# Altium PCB XC95144XL DEVBOARD.PcbDoc
Units mm, origin at the board's own origin, x right, y up, seen from the top; angles counter-clockwise.
Board outline 78.74 x 81.28 mm, 2 copper layers (Top Layer, Bottom Layer), stack 1.569 mm thick; 24 components, 91 nets, 253 pads, 68 vias.
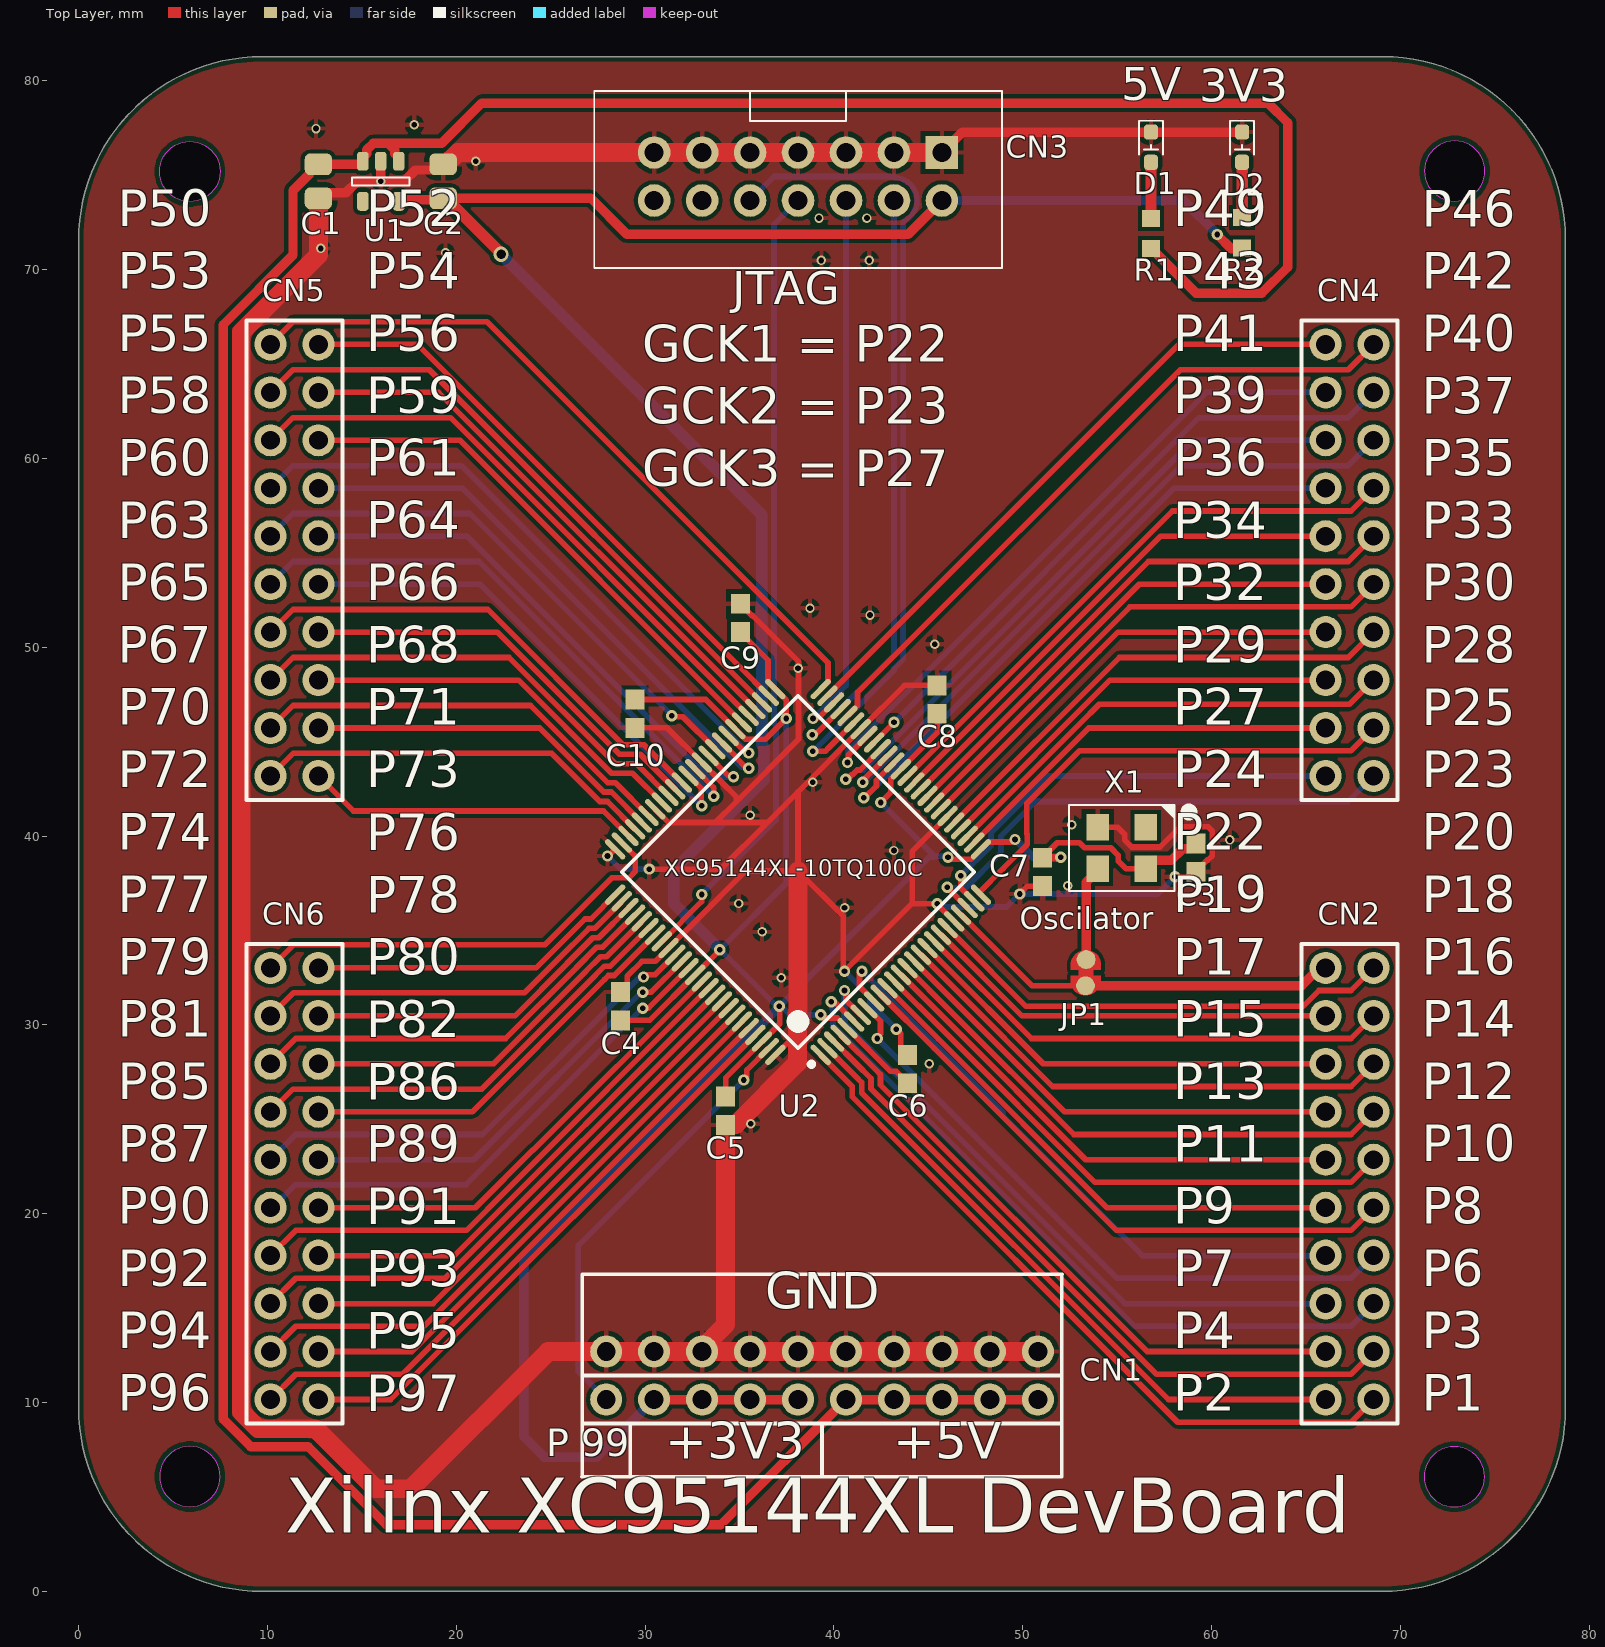
[diagram p0: Top Layer view]
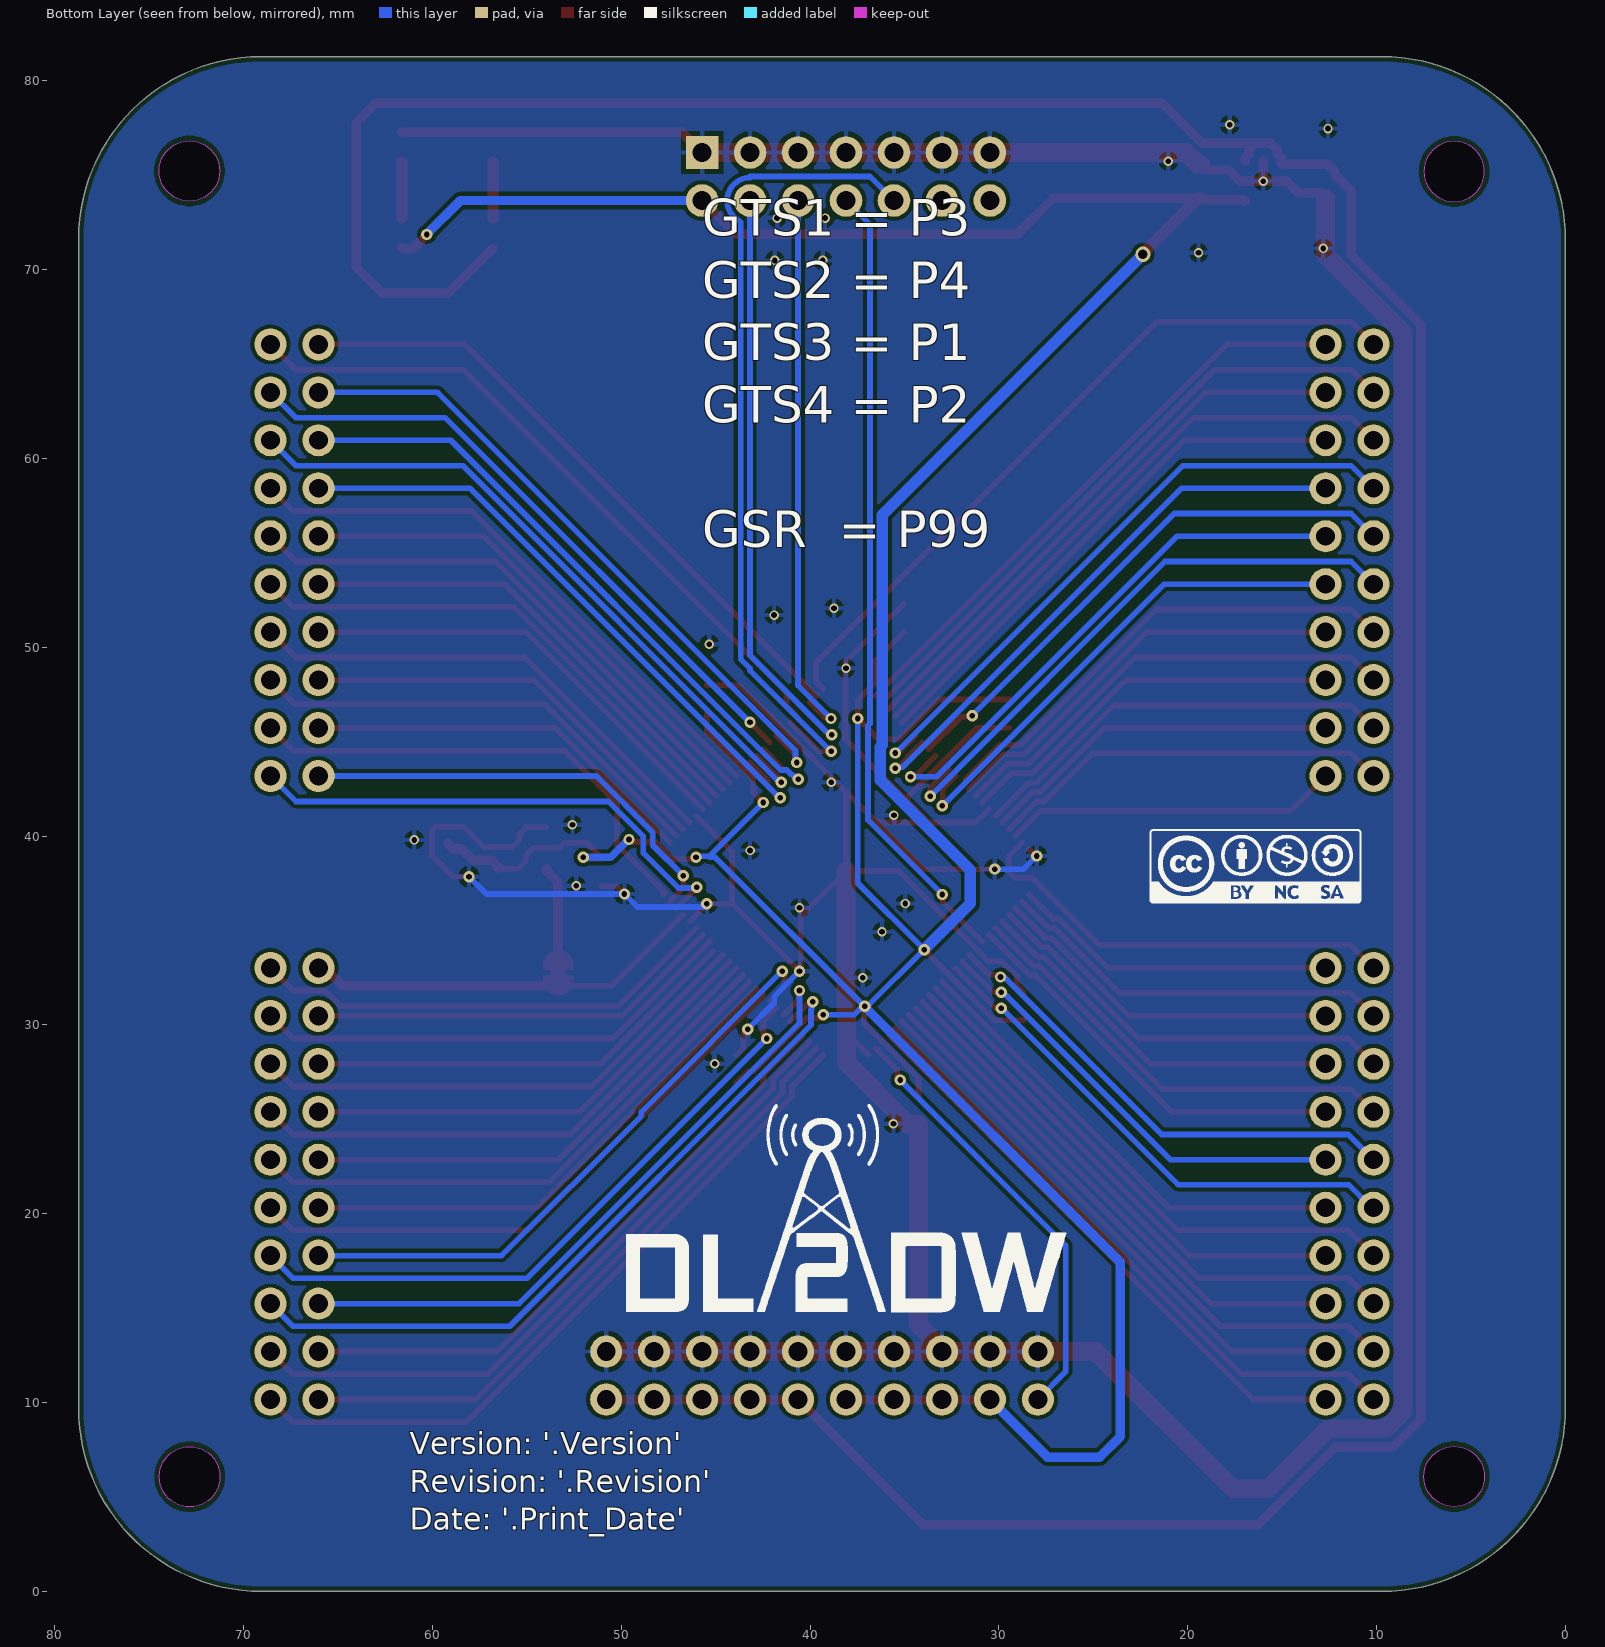
[diagram p1: Bottom Layer view, seen from below]
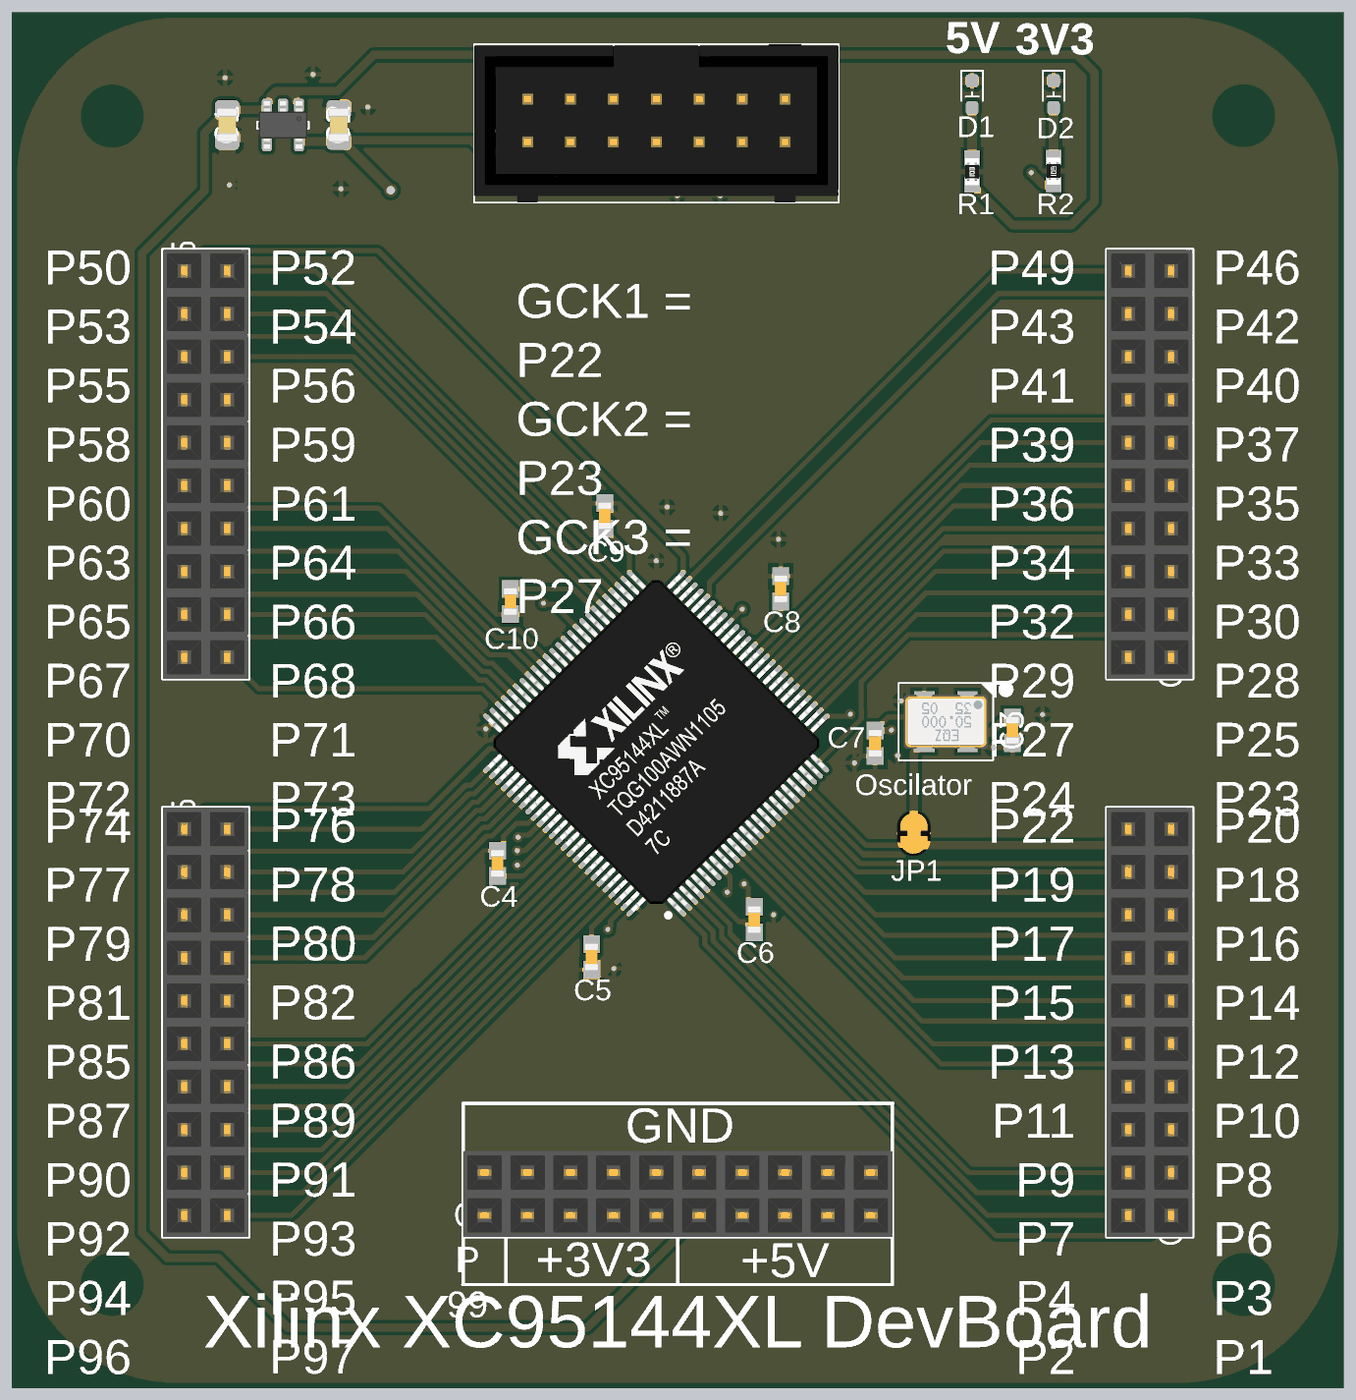
[diagram p2: 3D render of the assembled board from above, using the file's embedded part models]

## Layer stack, top to bottom
Top Solder: solder mask 0.0254, SM-001, Dk 4
Top Layer: signal copper 0.035
Dielectric 1: core 1.4986, Core-043, Dk 4.3
Bottom Layer: signal copper 0.035
Bottom Solder: solder mask 0.0254, SM-001, Dk 4

## Board outline
0,9.713 0,71.567 cw(c9.713,71.567) 9.713,81.28 69.079,81.28 cw(c69.079,71.619) 78.74,71.619 78.74,9.689 cw(c69.051,9.689) 69.051,0 9.713,0 cw(c9.713,9.713)
cut-out: 71.259,6.071 ccw(c72.859,6.071) 72.859,4.471 ccw(c72.859,6.071) 74.459,6.071 ccw(c72.859,6.071) 72.859,7.671 ccw(c72.859,6.071)
cut-out: 4.293,6.083 ccw(c5.893,6.083) 5.893,4.483 ccw(c5.893,6.083) 7.493,6.083 ccw(c5.893,6.083) 5.893,7.683 ccw(c5.893,6.083)
cut-out: 5.893,73.597 cw(c5.893,75.197) 4.293,75.197 cw(c5.893,75.197) 5.893,76.797 cw(c5.893,75.197) 7.493,75.197 cw(c5.893,75.197)
cut-out: 71.273,75.223 ccw(c72.873,75.223) 72.873,73.623 ccw(c72.873,75.223) 74.473,75.223 ccw(c72.873,75.223) 72.873,76.823 ccw(c72.873,75.223)

## Design rules (kind name [scope] priority, off if disabled: settings)
BoardOutlineClearance [All] p1: gap=0.254 ignorepadtopadclearanceinfootprint=FALSE
Clearance [All] p1: gap=0.2 ignorepadtopadclearanceinfootprint=TRUE
ComponentClearance ComponentClearance_Sheet [HasFootprint('PCB Title Block DIN A4')] p1: gap=0 collisioncheckmode=3 verticalgap=0 showdistances=FALSE
ComponentClearance [All] p2: gap=0.254 collisioncheckmode=3 verticalgap=0.254 showdistances=FALSE
MinimumSolderMaskSliver [All] p1: minsoldermaskwidth=0.103
PolygonConnect [All] p1: connectstyle=Relief reliefconductorwidth=0.254 reliefentries=4 polygonreliefangle="90 Angle" airgapwidth=0.254
RoutingVias RoutingVias_Power [(InNet('VCC') OR InNet('GND') OR InNet('+5V'))] p1: holewidth=0.3 width=0.6 viastyle="Through Hole" minholewidth=0.3 minwidth=0.6 maxholewidth=0.6 maxwidth=1.2
RoutingVias [All] p2: holewidth=0.4 width=0.7 viastyle="Through Hole" minholewidth=0.3 minwidth=0.6 maxholewidth=0.5 maxwidth=0.8
SilkToSilkClearance [All] p1: silktosilkclearance=0
SilkToSolderMaskClearance [IsPad] p1: minsilkscreentomaskgap=0.2 clearancetoexposedcopper=TRUE
SolderMaskExpansion [All] p1: expansion=0.038 istentingtop=FALSE
UnRoutedNet [All] p1: checkbadconnections=TRUE
Width Width_Power [(InNet('VCC') OR InNet('GND') OR InNet('+5V'))] p1: maxlimit=1 minlimit=0.3 preferedwidth=0.3
Width [All] p2: maxlimit=0.6 minlimit=0.3 preferedwidth=0.4
25 further rules are at their usual default settings.

## Components (designator, comment, footprint, x,y, rotation, side; value= is the part's Value field where it differs from the comment)
C1 "10µF" "Kemet C0805CxxxK8RACTU Series H=1.4mm" 12.7,74.676 r90 top
C2 "10µF" "Kemet C0805CxxxK8RACTU Series H=1.4mm" 19.304,74.676 r270 top
C3 "100nF" "CAP 100nF SMD 0603 C0603C104J3RACTU" 59.182,38.862 r90 top
C4 "100nF" "CAP 100nF SMD 0603 C0603C104J3RACTU" 28.702,30.988 r270 top
C5 "100nF" "CAP 100nF SMD 0603 C0603C104J3RACTU" 34.265,25.451 r90 top
C6 "100nF" "CAP 100nF SMD 0603 C0603C104J3RACTU" 43.898,27.663 r270 top
C7 "100nF" "CAP 100nF SMD 0603 C0603C104J3RACTU" 51.054,38.1 r90 top
C8 "100nF" "CAP 100nF SMD 0603 C0603C104J3RACTU" 45.466,47.232 r270 top
C9 "100nF" "CAP 100nF SMD 0603 C0603C104J3RACTU" 35.052,51.55 r270 top
C10 "100nF" "CAP 100nF SMD 0603 C0603C104J3RACTU" 29.464,46.482 r90 top
CN1 "Power" "Female Pin Header 02x10 Straight P2.54mm H8.5mm" 27.94,10.16 r0 top locked
CN2 "ext. CN 1" "Female Pin Header 02x10 Straight P2.54mm H8.5mm" 68.58,10.16 r90 top locked
CN3 "JTAG" "IDC Header 2x7 P2.54mm Straight" 45.72,76.2 r90 top
CN4 "ext. CN 2" "Female Pin Header 02x10 Straight P2.54mm H8.5mm" 68.58,43.18 r90 top locked
CN5 "ext. CN 3" "Female Pin Header 02x10 Straight P2.54mm H8.5mm" 10.16,66.04 r270 top locked
CN6 "ext. CN 4" "Female Pin Header 02x10 Straight P2.54mm H8.5mm" 10.16,33.02 r270 top locked
D1 "5V" "LED Red SMD 0603" 56.794,76.485 r270 top
D2 "3V3" "LED Green SMD 0603" 61.62,76.485 r270 top
JP1 "Oscilator" "Solder Jumper Closed" 53.34,32.766 r90 top net-tie
R1 "1k" "1k Ohm R 0603 SMD" 56.794,71.913 r90 top
R2 "1k" "1k Ohm R 0603 SMD" 61.62,71.951 r90 top
U1 "SPX5205M5-L-3-3/TR" SOT-23-5 16.002,74.676 r180 top
U2 "XC95144XL-10TQ100C" "TQFP-100 P0.5mm XC95144XL-7TQ100C" 38.1,38.1 r135 top locked
X1 "50MHz" "50.000MHZ Oscilator EuroQuartz XO53050UITA" 55.245,39.37 r180 top

## Footprints (in the part's own frame and the unit in brackets; to place one, negate y for a bottom-side part, rotate by r counter-clockwise, add the part's x,y. Pads: shape width x height; smd on the part's side, far side on the other; paste and mask are expansions set on the pad)
"1k Ohm R 0603 SMD" [mm] "Chip Resistor 2-Leads, Body 1,60x0,80mm, IPC Medium Density"
  rect 0.9x0.95 smd: 1(-0.8,0) 2(0.8,0)
  body extent -0.8,-0.4 0.8,0.4, height 0.45
"50.000MHZ Oscilator EuroQuartz XO53050UITA" [mm]
  rect 1.2x1.4 smd: 1(-1.27,-1.1) 2(1.27,-1.1) 3(1.27,1.1) 4(-1.27,1.1)
  silkscreen extent -3.76,-2.29 2.79,2.29, body extent -2.5,-1.6 2.5,1.6, height 1.01
"CAP 100nF SMD 0603 C0603C104J3RACTU" [mm] "Chip Capacitor, 2-Leads, Body 1,60x0,80mm, IPC Medium Density"
  rect 1.05x1 smd: 1(-0.75,0) 2(0.75,0)
  body extent -0.8,-0.4 0.8,0.4, height 0.87
"Female Pin Header 02x10 Straight P2.54mm H8.5mm" [mm]
  round 1.7 hole 1: 1(0,0) 2(2.54,0) 3(5.08,0) 4(7.62,0) 5(10.16,0) 6(12.7,0) 7(15.24,0) 8(17.78,0) 9(20.32,0) 10(22.86,0) 11(22.86,2.54) 12(20.32,2.54) 13(17.78,2.54) 14(15.24,2.54) 15(12.7,2.54) 16(10.16,2.54) 17(7.62,2.54) 18(5.08,2.54) 19(2.54,2.54) 20(0,2.54)
  silkscreen extent -1.27,-1.27 24.13,6.63, body extent -1.27,-1.27 24.13,3.81, height 8.5
"IDC Header 2x7 P2.54mm Straight" [mil]
  rect 68x68 hole 40: 1(0,0)
  round 68 hole 40: 2(-100,0) 3(0,100) 4(-100,100) 5(0,200) 6(-100,200) 7(0,300) 8(-100,300) 9(0,400) 10(-100,400) 11(0,500) 12(-100,500) 13(0,600) 14(-100,600)
  silkscreen extent -241,-125 128,725, body extent -240,-125 129,725, height 365
"Kemet C0805CxxxK8RACTU Series H=1.4mm" [mm]
  rrect50% 1.15x1.45 smd: 1(-0.9,0) 2(0.9,0)
  body extent -1,-0.62 1,0.62, height 1.4
"LED Green SMD 0603" [mm]
  rrect50% 0.8x0.75 smd: 1(-0.8,0) 2(0.8,0)
  silkscreen extent -1.4,-0.64 0.38,0.64, body extent -0.8,-0.4 0.8,0.4, height 0.4
"LED Red SMD 0603" [mm]
  rrect50% 0.8x0.75 smd: 1(-0.8,0) 2(0.8,0)
  silkscreen extent -1.4,-0.64 0.38,0.64, body extent -0.8,-0.4 0.8,0.4, height 0.4
"Solder Jumper Closed" [mm]
  round 1 smd paste-1 mask-1: 1(-0.695,0.016) 2(0.695,-0.016)
  Top Layer region: 0.165,0.804 0.378,0.804 0.695,0.741 0.964,0.561 1.143,0.292 1.207,-0.025 1.207,-0.025 1.147,-0.323 0.978,-0.576 0.725,-0.745 0.427,-0.804 0.427,-0.804 0.165,-0.804
  Top Layer region: -0.165,-0.804 -0.378,-0.804 -0.695,-0.741 -0.964,-0.561 -1.143,-0.292 -1.206,0.025 -1.206,0.025 -1.147,0.323 -0.978,0.576 -0.725,0.745 -0.427,0.804 -0.427,0.804 -0.165,0.804
  Top Layer region: 0.195,-0.406 -0.643,-0.406 -0.643,0.374 0.195,0.374
SOT-23-5 [mm]
  rrect50% 0.6x1 smd: 1(-0.95,-1.06) 2(0,-1.06) 3(0.95,-1.06) 4(0.95,1.06) 5(-0.95,1.06)
  silkscreen extent -1.52,-0.2 1.52,0.23, body extent -1.45,-1.41 1.45,1.41, height 1.3
"TQFP-100 P0.5mm XC95144XL-7TQ100C" [mm] "TSQFP, 100-Leads, Body 14,00x14,00mm, Pitch 0,50mm, IPC Medium Density"
  oval 1.4x0.3 smd: 1(-7.7,6) 2(-7.7,5.5) 3(-7.7,5) 4(-7.7,4.5) 5(-7.7,4) 6(-7.7,3.5) 7(-7.7,3) 8(-7.7,2.5) 9(-7.7,2) 10(-7.7,1.5) 11(-7.7,1) 12(-7.7,0.5) 13(-7.7,0) 14(-7.7,-0.5) 15(-7.7,-1) 16(-7.7,-1.5) 17(-7.7,-2) 18(-7.7,-2.5) 19(-7.7,-3) 20(-7.7,-3.5) 21(-7.7,-4) 22(-7.7,-4.5) 23(-7.7,-5) 24(-7.7,-5.5) 25(-7.7,-6) 51(7.7,-6) 52(7.7,-5.5) 53(7.7,-5) 54(7.7,-4.5) 55(7.7,-4) 56(7.7,-3.5) 57(7.7,-3) 58(7.7,-2.5) 59(7.7,-2) 60(7.7,-1.5) 61(7.7,-1) 62(7.7,-0.5) 63(7.7,0) 64(7.7,0.5) 65(7.7,1) 66(7.7,1.5) 67(7.7,2) 68(7.7,2.5) 69(7.7,3) 70(7.7,3.5) 71(7.7,4) 72(7.7,4.5) 73(7.7,5) 74(7.7,5.5) 75(7.7,6)
  oval 0.3x1.4 smd: 26(-6,-7.7) 27(-5.5,-7.7) 28(-5,-7.7) 29(-4.5,-7.7) 30(-4,-7.7) 31(-3.5,-7.7) 32(-3,-7.7) 33(-2.5,-7.7) 34(-2,-7.7) 35(-1.5,-7.7) 36(-1,-7.7) 37(-0.5,-7.7) 38(0,-7.7) 39(0.5,-7.7) 40(1,-7.7) 41(1.5,-7.7) 42(2,-7.7) 43(2.5,-7.7) 44(3,-7.7) 45(3.5,-7.7) 46(4,-7.7) 47(4.5,-7.7) 48(5,-7.7) 49(5.5,-7.7) 50(6,-7.7) 76(6,7.7) 77(5.5,7.7) 78(5,7.7) 79(4.5,7.7) 80(4,7.7) 81(3.5,7.7) 82(3,7.7) 83(2.5,7.7) 84(2,7.7) 85(1.5,7.7) 86(1,7.7) 87(0.5,7.7) 88(0,7.7) 89(-0.5,7.7) 90(-1,7.7) 91(-1.5,7.7) 92(-2,7.7) 93(-2.5,7.7) 94(-3,7.7) 95(-3.5,7.7) 96(-4,7.7) 97(-4.5,7.7) 98(-5,7.7) 99(-5.5,7.7) 100(-6,7.7)
  silkscreen extent -7.82,-6.6 6.6,6.82, body extent -8.01,-8.01 8.01,8.01, height 1.5

## Part data
C1 C2: library part CMP-Capacitors-Ceramic_Capacitors-00016-2, "KEMET - C0805C106K8RACTU - CAP, 10µF, 10V, 10%, X7R, 0805", Capacitance=10uF, Case Code (Imperial)=0805, Case Code (Metric)=2012, Dielectric=X7R, Dielectric Material=Ceramic, Max Operating Temperature=125°C, Min Operating Temperature=-55°C, Package Quantity=1, Tolerance=10%, Voltage=10V, Case/Package=0805, Depth=1.25mm, Dissipation Factor=7.5%, Height=1.25mm, Length=2mm, Mount="Surface Mount,PCB", Packaging="Tape and Reel", REACH SVHC="No SVHC", Termination=SMD/SMT, Thickness=0.055inch, Voltage Rating=10V, Voltage Rating (DC)=10V, Width=1.2mm
C3 C4 C5 C6 C7 C8 C9 C10: library part CMP-Capacitors-Ceramic_Capacitors-00012-1, "KEMET         C0603C104J3RACTU             SMD Multilayer Ceramic Capacitor, 0603 [1608 Metric], 0.1 F, 25 V,  5%, X7R, C Series", Case Code (Imperial)=0603, Case Code (Metric)=1608, Dielectric=X7R, Dielectric Material=Ceramic, Max Operating Temperature=125°C, Min Operating Temperature=-55°C, Package Quantity=4000, Tolerance=5%, Voltage=25V, Capacitance=100nF, Case/Package=0603, Contact Plating=Tin,Matte, Depth=0.8mm, Height=0.8mm, Lead Pitch=0.7mm, Length=1.6mm, Mount="Surface Mount,PCB", Number of Pins=2, Packaging="Tape and Reel", Radiation Hardening=No, REACH SVHC="No SVHC", Termination=SMD/SMT, Thickness=0.034inch, Voltage Rating=25V, Voltage Rating (DC)=25V, Width=0.031inch
CN1 CN2 CN4 CN5 CN6: library part CMP-Connectors-Female_Pin_Headers00047-1, "Headers & Wire Housings 10+10 VERT SOCKET DIL", Color=Black, Contact Resistance=20mR, Max Current Rating=3A, Max Operating Temperature=105°C, Min Operating Temperature=-40°C, Package Quantity=23, Connector Type=Receptacle,Socket, Contact Gender=Female, Contact Material=Bronze, Contact Plating=Gold,Tin, Depth=5.04mm, Gender=Female, Housing Color=Black, Housing Material=Polyamide, Length=25.8mm, Mount="Through Hole", Number of Contacts=20, Number of Positions=20, Number of Rows=2, Orientation=Straight, Packaging=Rail/Tube, Pitch=2.54mm, Radiation Hardening=No, REACH SVHC="No SVHC", Row Spacing=0.1inch, Termination=Solder
CN3: library part CMP-Connectors-IDC_Connectors-00028-1, "Conn Shrouded Header HDR 14 POS 2.54mm Solder ST Thru-Hole", Color=Black, Max Operating Temperature=125°C, Min Operating Temperature=-55°C, Package Quantity=1, Connector Type="Male Pin", Contact Material=Bronze, Contact Mating Length=0.25inch, Contact Plating=Gold, Depth=9.27mm, Gender=Male, Housing Color=Black, Housing Material=Polyester, Length=21.59mm, Mount="Through Hole", Number of Contacts=14, Number of Positions=14, Number of Rows=2, Orientation=Straight, Packaging=Bulk, Pitch=2.54mm, Radiation Hardening=No, REACH SVHC="No SVHC", Row Spacing=0.1inch, Termination=Solder
D1: library part CMP-LEDs-00005-1, "LED RED DIFFUSED 0603 SMD", Case Code (Imperial)=0603, Case Code (Metric)=1608, Color=Red, Forward Voltage=2V, Test Current=20mA, Case/Package=0603, Dominant Wavelength=630nm, Height=0.5mm, Length=1.6mm, Lens Size=0.8mm, Lens Style=Flat, Lens Transparency=Diffused, Luminous Intensity=70mcd, Mount="Surface Mount", Packaging="Tape and Reel", Viewing Angle=140°, Width=0.8mm
D2: library part CMP-LEDs-00004-2, "LED BLUE DIFFUSED 0603 SMD", Case/Package=0603, Color=Blue, Forward Voltage=3.2V, Test Current=20mA, Dominant Wavelength=470nm, Height=0.5mm, Length=1.6mm, Lens Size=0.8mm, Lens Style=Flat, Lens Transparency=Diffused, Luminous Intensity=80mcd, Mount="Surface Mount", Packaging="Tape and Reel", Viewing Angle=140°, Width=0.8mm
JP1: library part CMP-Mechanicals-00017-7, "Solder Jumper Closed"
R1 R2: library part CMP-Resistors-Yageo_SMD_060300002-1, "RES SMD 1K OHM 1% 1/10W 0603", Case Code (Imperial)=0603, Case Code (Metric)=1608, Max Operating Temperature=155°C, Min Operating Temperature=-55°C, Power Rating=100mW, Resistance=1kR, Temperature Coefficient=100ppm/°C, Tolerance=1%, Voltage Rating=50V, Case/Package=0603, Composition="Thick Film", Contact Plating=Tin,Matte, Depth=0.8mm, Height=0.45mm, Lead Free="Lead Free", Length=1.6mm, Military Standard=Not, Packaging="Tape and Reel", Radiation Hardening=No, REACH SVHC="No SVHC", Termination=SMD/SMT
U1: library part CMP-ICs-Power_Supply-00002-2, "LDO Regulator Pos 3.3V 0.15A 5-Pin SOT-23 T/R", Case/Package=SOT-23, Dropout Voltage=210mV, Max Input Voltage=16V, Max Operating Temperature=125°C, Max Output Current=150mA, Min Input Voltage=2.5V, Min Operating Temperature=-40°C, Min Output Voltage=3.3V, Quiescent Current=1uA, Accuracy=1%, Height=1.15mm, Lead Free="Lead Free", Length=2.9mm, Mount="Surface Mount", Number of Outputs=1, Number of Pins=5, Number of Regulators=1, Output Current=150mA, Output Type=Fixed, Output Voltage=3.3V, Packaging="Tape and Reel", Polarity=Positive, Radiation Hardening=No, Width=1.6mm
U2: library part CMP-ICs-CPLD_FPGA-00000-1, "IC CPLD 144MC 7.5NS 100TQFP", Case/Package=LQFP, Max Frequency=125MHz, Max Operating Temperature=70°C, Max Supply Voltage=3.6V, Min Operating Temperature=0°C, Min Supply Voltage=3V, Operating Supply Voltage=3.3V, Package Quantity=90, Contact Plating=Tin,Lead, Lead Free="Contains Lead", Memory Type=FLASH, Mount="Surface Mount", Number of Gates=3200, Number of I/Os=81, Number of Logic Blocks (LABs)=8, Number of Logic Elements/Cells=8, Number of Macrocells=144, Number of Pins=100, Packaging=Tray, Propagation Delay=7.5ns, Speed Grade=7, Turn-On Delay Time=7.5ns
X1: library part CMP-Crystals_Oscilators-00004-1, "XO53050UITA-50.000, Crystal Oscillator, 50 MHz, 50ppm HCMOS, LSTTL 15pF, 4-Pin SMD, 5 x 3.2 x 1mm", Case/Package=SMD/SMT, Frequency Stability=50ppm, Load Capacitance=15pF, Max Operating Temperature=85°C, Min Operating Temperature=-40°C, Height=1mm, Length=5mm, Mount="Surface Mount", Number of Pins=4, Width=3.2mm

## Via types
v1: diameter 0.6, hole 0.3, Top Layer to Bottom Layer, tented both sides, 41 vias
v2: diameter 0.5, hole 0.3, Top Layer to Bottom Layer, tented both sides, 26 vias
v3: diameter 0.8, hole 0.5, Top Layer to Bottom Layer, tented both sides, 1 vias

## Nets (pads, with @x,y where several pads share a name; then routed paths per layer and width w, separated by ;. In a path a pad name is that pad's centre, name@x,y a point inside that pad or via, vN(x,y) a via of type N, cw(c..) or ccw(c..) an arc to the next point about the centre after c; other vN are vias at no path point)
+3V3: C2.2 C3.2 C4.2 C5.2 C6.2 C7.2 C8.2 C9.2 C10.2 CN1.2 CN1.3 CN1.4 CN1.5 CN3.2 R2.1 U1.5 U2.5 U2.26 U2.38 U2.51 U2.57 U2.88 U2.98 X1.4 | length 235.6
  Top Layer w0.3: C4.2 30.238,30.238 U2.88 33.96,33.96 v1(33.96,33.985) ; C10.2 33.211,47.232 35.312,45.131 36.381,45.131 v1(37.475,46.225) ; C5.2 34.265,27.194 U2.98 37.135,30.064 37.135,30.953 v1(37.1,30.988) ; C9.2 35.052,50.775 36.509,49.318 36.509,48.176 37.475,47.21 37.475,46.337 v1@37.44,46.301 ; v1@39.474,30.362 40.181,30.362 U2.5 43.006,27.538 43.298,27.538 43.898,26.938 C6.2 ; v1(42.484,41.777) 43.009,42.302 43.009,43.009 U2.38 45.466,45.466 C8.2 ; v1(46.04,38.875) 46.121,38.875 46.229,38.767 47.252,38.767 U2.26 48.176,39.691 49.378,39.691 49.507,39.82 v1(49.588,39.82) ; C7.2 51.054,38.875 51.828,39.649 53.001,39.649 53.268,39.382 54.658,39.382 55.061,38.979 55.061,38.674 55.465,38.27 X1.4
  Top Layer w0.4: C7.2 51.994,38.85 v1(52.019,38.875)
  Top Layer w0.5: U1.5 16.952,73.646 17.002,73.696 19.224,73.696 C2.2 ; C2.2@19.454,73.776 27.127,73.776 29.021,71.882 43.942,71.882 CN3.2 ; CN1.2 CN1.3 CN1.4 CN1.5 ; X1.4 56.515,38.37 56.865,38.72 57.865,38.72 58.482,39.337 58.932,39.337 59.182,39.587 C3.2 ; v1(60.3,71.857) 60.3,71.85 61.036,71.113 61.582,71.113 R2.1
  Top Layer w0.6: C2.2 19.454,73.776 22.301,70.929 22.301,70.891 v3(22.377,70.815)
  Bottom Layer w0.3: v1@36.9,31.045 v1(33.96,33.985) 37.475,37.501 v1(37.475,46.225) ; v1(37.1,30.988) v1@37.135,30.988 ; v1(39.302,30.534) 37.67,30.534 37.216,30.988 v1@37.135,30.988 ; v1(42.484,41.777) 45.329,38.932 45.982,38.932 v1(46.04,38.875) ; 45.329,38.875 45.022,38.875 v1@37.135,30.988 ; v1@49.53,39.903 49.53,39.878 v1(49.588,39.82)
  Bottom Layer w0.4: v1@49.53,39.903 50.558,38.875 v1(52.019,38.875)
  Bottom Layer w0.5: CN1.2 27.432,7.112 24.663,7.112 23.571,8.204 23.571,17.424 v1@37.135,30.988 ; CN3.2 58.522,73.66 60.3,71.882 v1(60.3,71.857)
  Bottom Layer w0.6: v3(22.377,70.815) 36.175,57.017 36.175,44.838 36.284,44.729 36.284,42.963 31.516,38.195 31.516,36.429 v1(33.96,33.985)
+5V: C1.2 CN1.6 CN1.7 CN1.8 CN1.9 CN1.10 R1.1 U1.1 U1.3 | length 187.8
  Top Layer w0.5: U1.1 16.952,75.936 16.752,76.136 16.752,76.335 16.401,76.686 ; CN1.10 CN1.9 CN1.8 CN1.7 CN1.6 34.011,3.531 16.288,3.531 12.159,7.66 9.124,7.66 7.66,9.124 7.66,67.076 11.354,70.769 11.354,74.198 12.248,75.092 12.248,75.254 12.57,75.576 15.002,75.576 15.052,75.626 U1.3 15.052,75.936 15.252,76.136 15.252,76.335 15.603,76.686 16.401,76.686 ; R1.1 56.819,71.113 59.175,68.758 62.662,68.758 64.033,70.129 64.033,77.775 62.992,78.816 21.351,78.816 19.22,76.686 16.401,76.686
GND: C1.1 C2.1 C3.1 C4.1 C5.1 C6.1 C7.1 C8.1 C9.1 C10.1 CN1.11 CN1.12 CN1.13 CN1.14 CN1.15 CN1.16 CN1.17 CN1.18 CN1.19 CN1.20 CN3.1 CN3.3 CN3.5 CN3.7 CN3.9 CN3.11 CN3.13 D1.1 D2.1 U1.2 U2.21 U2.31 U2.44 U2.62 U2.69 U2.75 U2.84 U2.100 X1.2 | length 311.7
  Top Layer w0.3: v1(28.005,38.949) 28.059,38.949 U2.75 ; C4.1 29.052,32.088 29.052,32.588 29.831,33.367 30.538,33.367 U2.84 32.655,35.484 35.322,38.151 38.1,38.151 ; C10.1 29.466,45.73 31.177,45.73 U2.62 34.032,42.876 34.834,42.073 34.834,41.834 ; v1(30.226,38.252) 34.01,38.252 36.474,40.716 ; U2.69 31.241,40.716 33.716,40.716 ; C9.1 35.052,52.275 35.645,51.682 35.69,51.682 38.125,49.247 38.125,48.895 38.125,45.126 34.834,41.834 ; U2.100 38.063,29.578 ; v1@40.506,32.861 40.506,32.985 40.492,33 40.492,35.759 38.1,38.151 ; v1(40.564,32.847) 44.14,36.424 ; v1(43.298,29.779) 43.548,29.529 43.548,28.763 C6.1 ; C8.1 43.739,47.982 U2.44 38.1,42.343 ; U2.31 44.14,39.191 44.14,36.424 ; U2.21 45.466,36.391 v1(45.466,36.424) 44.14,36.424 ; v1(49.835,36.932) 50.253,37.35 C7.1 ; X1.2 55.025,40.47 55.398,40.097 55.398,39.793 55.77,39.42 57.265,39.42 58.332,40.487 59.827,40.487 60.032,40.282 60.032,38.942 59.82,38.73 59.775,38.73 59.182,38.137 C3.1 58.916,37.846 v1(58.064,37.846) ; 33.716,40.716 34.834,41.834 ; 33.716,40.716 36.474,40.716 ; 36.474,40.716 38.1,42.343 ; 38.1,38.151 38.1,42.343
  Top Layer w0.5: C1.1 13.002,74.078 14.165,74.078 14.763,74.676 v2(16.002,74.676) ; U1.2 v2(16.002,74.676) ; C2.1 19.002,75.274 17.839,75.274 17.241,74.676 v2(16.002,74.676) ; CN3.1 46.805,77.285 D1.1 D2.1
  Top Layer w1: C1.1 12.7,70.772 8.61,66.682 8.61,9.518 9.518,8.61 12.552,8.61 15.727,5.436 17.602,5.436 24.867,12.7 CN1.20 CN1.19 CN1.18 ; C2.1 19.454,75.576 20.078,76.2 21.026,76.2 CN3.13 CN3.11 CN3.9 CN3.7 CN3.5 CN3.3 CN3.1 ; 38.1,38.151 38.1,30.574 38.063,30.537 38.063,29.578 38.063,27.984 34.805,24.726 34.265,24.726 C5.1 34.265,14.134 33.02,12.889 CN1.18 ; CN1.11 CN1.12 CN1.13 CN1.14 CN1.15 CN1.16 CN1.17 CN1.18
  Bottom Layer w0.3: v1(28.005,38.949) 28.701,38.252 v1(30.226,38.252) ; v1(40.564,32.847) 41.902,31.508 41.902,31.175 v1(43.298,29.779) ; v1(45.466,36.424) 45.644,36.246 49.149,36.246 v1(49.835,36.932) 57.15,36.932 v1(58.064,37.846)
  other v2: 35.588,24.765 45.048,27.947 37.216,32.491 36.195,34.925 40.564,36.207 34.961,36.429 52.392,37.37 43.18,39.235 60.96,39.796 52.588,40.597 35.56,41.095 38.887,42.85 38.1,48.895 45.339,50.165 41.91,51.707 38.735,52.07 39.338,70.485 41.878,70.485 19.431,70.891 12.827,71.12 39.211,72.731 41.751,72.731 21.026,75.736 12.573,77.47 17.78,77.667
NetD1_2: D1.2 R1.2 | length 3
  Top Layer w0.6: R1.2 D1.2
NetD2_2: D2.2 R2.2 | length 2.9
  Top Layer w0.6: R2.2 D2.2
OSC_50MHZ: JP1.2 X1.3 | length 5.1
  Top Layer w0.5: JP1.2 53.356,37.551 53.975,38.17 X1.3
P1: CN2.1 U2.1 | length 38.2
  Top Layer w0.3: U2.1 40.328,27.386 40.966,26.749 40.966,26.204 58.21,8.96 67.38,8.96 CN2.1
P2: CN2.20 U2.2 | length 34.4
  Top Layer w0.3: U2.2 41.22,27.201 41.466,26.956 41.466,26.411 57.717,10.16 CN2.20
P3: CN2.2 U2.3 | length 36.7
  Top Layer w0.3: U2.3 41.182,27.947 41.966,27.163 41.966,26.618 57.084,11.5 67.38,11.5 CN2.2
P4: CN2.19 U2.4 | length 32.9
  Top Layer w0.3: U2.4 42.382,27.454 42.466,27.37 42.466,26.825 56.591,12.7 CN2.19
P6: CN2.3 U2.6 | length 38.6
  Top Layer w0.3: v1(39.865,31.229) 39.885,31.21 40.04,31.21 U2.6
  Bottom Layer w0.3: v1(39.865,31.229) 39.923,31.172 39.923,30.832 39.952,30.803 39.952,29.998 55.911,14.04 67.38,14.04 CN2.3
P7: CN2.18 U2.7 | length 35
  Top Layer w0.3: v1(40.564,31.826) 40.621,31.769 40.621,31.336 U2.7
  Bottom Layer w0.3: v1(40.564,31.826) 40.564,30.094 55.418,15.24 CN2.18
P8: CN2.4 U2.8 | length 34
  Top Layer w0.3: U2.8 42.466,30.199 42.466,29.528 42.298,29.36 v1(42.298,29.279)
  Bottom Layer w0.3: v1(42.298,29.279) 54.997,16.58 67.38,16.58 CN2.4
P9: CN2.17 U2.9 | length 32.9
  Top Layer w0.3: v1(41.483,32.847) 41.351,32.715 41.351,32.02 U2.9
  Bottom Layer w0.3: v1(41.483,32.847) 48.939,25.391 48.939,25.179 56.338,17.78 CN2.17
P10: CN2.5 U2.10 | length 31.8
  Top Layer w0.3: U2.10 45.3,28.779 54.959,19.12 67.38,19.12 CN2.5
P11: CN2.16 U2.11 | length 28
  Top Layer w0.3: U2.11 45.507,29.279 54.466,20.32 CN2.16
P12: CN2.6 U2.12 | length 30.3
  Top Layer w0.3: U2.12 45.714,29.779 53.833,21.66 67.38,21.66 CN2.6
P13: CN2.15 U2.13 | length 26.6
  Top Layer w0.3: U2.13 45.921,30.279 53.34,22.86 CN2.15
P14: CN2.7 U2.14 | length 28.8
  Top Layer w0.3: U2.14 46.128,30.779 52.707,24.2 67.38,24.2 CN2.7
P15: CN2.14 U2.15 | length 25.1
  Top Layer w0.3: U2.15 46.336,31.279 52.214,25.4 CN2.14
P16: CN2.8 U2.16 | length 27.4
  Top Layer w0.3: U2.16 46.543,31.779 51.581,26.74 67.38,26.74 CN2.8
P17: CN2.13 U2.17 | length 23.4
  Top Layer w0.3: U2.17@45.136,33.893 51.088,27.94 CN2.13
P18: CN2.9 U2.18 | length 25.9
  Top Layer w0.3: U2.18 50.456,29.28 67.38,29.28 CN2.9
P19: CN2.12 U2.19 | length 22.2
  Top Layer w0.3: U2.19 49.963,30.48 CN2.12
P20: CN2.10 U2.20 | length 25.1
  Top Layer w0.3: U2.20 46.555,34.595 50.17,30.98 64.843,30.98 65.683,31.82 67.38,31.82 CN2.10
P22: CN2.11 JP1.1 U2.22 | length 21.3
  Top Layer w0.3: U2.22 50.493,32.071 JP1.1
  Top Layer w0.5: JP1.1 64.766,32.071 65.715,33.02 CN2.11
P23: CN4.1 U2.23 | length 27.1
  Top Layer w0.3: v1(45.999,37.287) 45.999,37.272 U2.23
  Bottom Layer w0.3: v1(45.999,37.287) 46.04,37.247 46.98,37.247 48.831,39.098 48.831,39.982 50.683,41.834 67.234,41.834 CN4.1
P24: CN4.20 U2.24 | length 23.6
  Top Layer w0.3: v1(46.711,37.897) 46.711,37.268 U2.24
  Bottom Layer w0.3: v1(46.711,37.897) 48.331,39.517 48.331,40.19 51.322,43.18 CN4.20
P25: CN4.2 U2.25 | length 26
  Top Layer w0.3: U2.25 47.686,36.999 48.962,38.275 50.238,39.551 50.238,40.089 50.221,40.107 50.221,41.735 53.005,44.52 67.38,44.52 CN4.2
P27: CN4.19 U2.27 | length 21.1
  Top Layer w0.3: U2.27 53.498,45.72 CN4.19
P28: CN4.3 U2.28 | length 24.9
  Top Layer w0.3: U2.28 53.04,45.969 54.052,46.981 67.301,46.981 CN4.3
P29: CN4.18 U2.29 | length 22.6
  Top Layer w0.3: U2.29 54.624,48.26 CN4.18
P30: CN4.4 U2.30 | length 26.4
  Top Layer w0.3: U2.30 55.117,49.46 67.24,49.46 CN4.4
P32: CN4.17 U2.32 | length 24.3
  Top Layer w0.3: U2.32 54.039,49.796 55.043,50.8 CN4.17
P33: CN4.5 U2.33 | length 28.1
  Top Layer w0.3: U2.33 55.676,52.14 67.38,52.14 CN4.5
P34: CN4.16 U2.34 | length 25.7
  Top Layer w0.3: U2.34 56.168,53.34 CN4.16
P35: CN4.6 U2.35 | length 29.5
  Top Layer w0.3: U2.35 56.661,54.54 67.24,54.54 CN4.6
P36: CN4.15 U2.36 | length 27.2
  Top Layer w0.3: U2.36 57.294,55.88 CN4.15
P37: CN4.7 U2.37 | length 31
  Top Layer w0.3: U2.37 57.927,57.22 67.38,57.22 CN4.7
P39: CN4.14 U2.39 | length 33.8
  Top Layer w0.3: v1(41.582,42.037) 41.635,42.037 42.255,42.656 42.255,42.962 U2.39
  Bottom Layer w0.3: v1(41.582,42.037) 41.635,42.037 58.018,58.42 CN4.14
P40: CN4.8 U2.40 | length 36.5
  Top Layer w0.3: v1(41.529,42.85) 41.529,42.892 41.504,42.918 U2.40
  Bottom Layer w0.3: v1(41.529,42.85) 41.61,42.85 41.76,43 41.78,43 58.4,59.62 67.24,59.62 CN4.8
P41: CN4.13 U2.41 | length 35.4
  Top Layer w0.3: v1(40.624,43.009) 40.705,43.009 40.944,43.248 40.986,43.248 41.237,43.5 41.378,43.5 U2.41
  Bottom Layer w0.3: v1(40.624,43.009) 40.705,43.009 40.944,43.248 40.986,43.248 41.237,43.5 41.573,43.5 59.033,60.96 CN4.13
P42: CN4.9 U2.42 | length 34.1
  Top Layer w0.3: U2.42 43.182,46.011 v1(43.182,46.028)
  Bottom Layer w0.3: v1(43.182,46.028) 43.2,46.028 59.332,62.16 67.24,62.16 CN4.9
P43: CN4.12 U2.43 | length 35.6
  Top Layer w0.3: v1(40.716,43.898) 40.774,43.956 40.774,44.309 U2.43
  Bottom Layer w0.3: v1(40.716,43.898) 40.774,43.956 40.774,44.539 59.735,63.5 CN4.12
P46: CN4.10 U2.46 | length 36.4
  Top Layer w0.3: U2.46 41.105,46.762 41.252,46.909 41.252,47.602 58.35,64.7 67.24,64.7 CN4.10
P49: CN4.11 U2.49 | length 34.1
  Top Layer w0.3: U2.49 58.262,66.04 CN4.11
P50: CN5.1 U2.50 | length 39.1
  Top Layer w0.3: CN5.1 11.36,67.24 21.632,67.24 39.691,49.181 39.691,48.176 U2.50
P52: CN5.20 U2.52 | length 31.6
  Top Layer w0.3: CN5.20 17.938,66.04 35.004,48.974 U2.52
P53: CN5.2 U2.53 | length 33.8
  Top Layer w0.3: CN5.2 11.36,64.7 18.571,64.7 U2.53
P54: CN5.19 U2.54 | length 30.1
  Top Layer w0.3: CN5.19 19.064,63.5 U2.54
P55: CN5.3 U2.55 | length 32.4
  Top Layer w0.3: CN5.3 11.36,62.16 19.697,62.16 U2.55
P56: CN5.18 U2.56 | length 28.6
  Top Layer w0.3: CN5.18 20.19,60.96 U2.56
P58: CN5.4 U2.58 | length 33.6
  Top Layer w0.3: U2.58 35.338,44.398 v1(35.484,44.398)
  Bottom Layer w0.3: CN5.4 11.36,59.62 20.262,59.62 v1(35.484,44.398)
P59: CN5.17 U2.59 | length 30.9
  Top Layer w0.3: U2.59 34.834,44.195 34.834,44.129 35.319,43.644 35.426,43.644 v1(35.484,43.586)
  Bottom Layer w0.3: CN5.17 20.326,58.42 35.102,43.644 35.426,43.644 v1(35.484,43.586)
P60: CN5.5 U2.60 | length 29.2
  Top Layer w0.3: v1(31.42,46.38) 31.477,46.323 31.998,46.323 U2.60
  Bottom Layer w0.3: CN5.5 11.36,57.08 20.72,57.08 v1(31.42,46.38)
P61: CN5.16 U2.61 | length 29
  Top Layer w0.3: U2.61 34.423,43.191 34.635,43.191 v1(34.682,43.145)
  Bottom Layer w0.3: CN5.16 20.57,55.88 33.305,43.145 v1(34.682,43.145)
P63: CN5.6 U2.63 | length 30.9
  Top Layer w0.3: U2.63 33.63,42.57 v1(33.63,42.113)
  Bottom Layer w0.3: CN5.6 11.36,54.54 21.203,54.54 v1(33.63,42.113)
P64: CN5.15 U2.64 | length 27
  Top Layer w0.3: U2.64 32.98,42.513 32.98,41.62 v1(32.995,41.605)
  Bottom Layer w0.3: CN5.15 21.26,53.34 v1(32.995,41.605)
P65: CN5.7 U2.65 | length 25.8
  Top Layer w0.3: CN5.7 11.36,52 21.676,52 28.845,44.831 29.955,44.831 U2.65@31.775,43.011
P66: CN5.14 U2.66 | length 22.3
  Top Layer w0.3: CN5.14 22.169,50.8 28.638,44.331 29.748,44.331 U2.66
P67: CN5.8 U2.67 | length 24.6
  Top Layer w0.3: CN5.8 11.36,49.46 22.802,49.46 28.431,43.831 29.541,43.831 U2.67
P68: CN5.13 U2.68 | length 20.9
  Top Layer w0.3: CN5.13 23.295,48.26 28.224,43.331 29.333,43.331 U2.68
P70: CN5.9 U2.70 | length 22.9
  Top Layer w0.3: CN5.9 11.36,46.92 23.928,46.92 28.017,42.831 28.419,42.831 U2.70
P71: CN5.12 U2.71 | length 19.2
  Top Layer w0.3: CN5.12 24.421,45.72 27.81,42.331 28.212,42.331 U2.71
P72: CN5.10 U2.72 | length 21.5
  Top Layer w0.3: CN5.10 11.36,44.38 25.053,44.38 27.602,41.831 28.005,41.831 U2.72
P73: CN5.11 U2.73 | length 17.7
  Top Layer w0.3: CN5.11 14.549,41.331 27.798,41.331 U2.73
P74: CN6.1 U2.74 | length 23.3
  Top Layer w0.3: CN6.1 11.379,34.239 24.689,34.239 28.236,37.787 29.151,37.787 29.473,38.109 29.473,38.949 U2.74
P76: CN6.20 U2.76 | length 17.3
  Top Layer w0.3: CN6.20 24.221,33.02 26.814,35.613 27.128,35.613 U2.76
P77: CN6.2 U2.77 | length 21.1
  Top Layer w0.3: CN6.2 11.379,31.699 23.618,31.699 25.352,33.434 25.352,33.443 27.022,35.113 27.335,35.113 U2.77
P78: CN6.19 U2.78 | length 18.8
  Top Layer w0.3: CN6.19 23.106,30.48 25.852,33.226 25.852,33.236 27.229,34.613 27.542,34.613 U2.78
P79: CN6.3 U2.79 | length 22.6
  Top Layer w0.3: CN6.3 11.5,29.28 22.613,29.28 26.352,33.019 26.352,33.029 27.436,34.113 27.749,34.113 U2.79
P80: CN6.18 U2.80 | length 20.3
  Top Layer w0.3: CN6.18 21.98,27.94 26.852,32.812 26.852,32.822 27.643,33.613 27.956,33.613 U2.80
P81: CN6.4 U2.81 | length 24.1
  Top Layer w0.3: CN6.4 11.36,26.6 21.347,26.6 27.352,32.605 27.352,32.615 27.85,33.113 28.163,33.113 U2.81
P82: CN6.17 U2.82 | length 21.7
  Top Layer w0.3: CN6.17 20.854,25.4 27.852,32.398 27.852,32.408 28.057,32.613 28.37,32.613 U2.82
P85: CN6.5 U2.85 | length 25.9
  Top Layer w0.3: v1(29.92,32.536) 29.927,32.536 30.046,32.655 30.534,32.655 U2.85
  Bottom Layer w0.3: CN6.5 11.5,24.2 21.381,24.2 29.718,32.536 v1(29.92,32.536)
P86: CN6.16 U2.86 | length 23.6
  Top Layer w0.3: v1(29.871,31.738) 30.324,31.738 U2.86
  Bottom Layer w0.3: CN6.16 20.923,22.86 29.801,31.738 v1(29.871,31.738)
P87: CN6.6 U2.87 | length 27.4
  Top Layer w0.3: v1(29.87,30.888) 30.181,30.888 U2.87
  Bottom Layer w0.3: CN6.6 10.262,20.32 11.481,21.539 20.522,21.539 v1(29.87,30.888)
P89: CN6.15 U2.89 | length 25.3
  Top Layer w0.3: CN6.15 21.006,20.32 24.079,23.393 24.101,23.393 U2.89
P90: CN6.7 U2.90 | length 29.1
  Top Layer w0.3: CN6.7 11.5,19.12 20.534,19.12 22.704,21.289 U2.90
P91: CN6.14 U2.91 | length 26.7
  Top Layer w0.3: CN6.14 19.901,17.78 U2.91
P92: CN6.8 U2.92 | length 30.5
  Top Layer w0.3: CN6.8 11.5,16.58 19.408,16.58 U2.92
P93: CN6.13 U2.93 | length 28.2
  Top Layer w0.3: CN6.13 18.776,15.24 U2.93
P94: CN6.9 U2.94 | length 32
  Top Layer w0.3: CN6.9 11.5,14.04 18.283,14.04 U2.94
P95: CN6.12 U2.95 | length 29.7
  Top Layer w0.3: CN6.12 17.65,12.7 U2.95
P96: CN6.10 U2.96 | length 33.5
  Top Layer w0.3: CN6.10 11.5,11.5 17.157,11.5 U2.96
P97: CN6.11 U2.97 | length 31.1
  Top Layer w0.3: CN6.11 16.524,10.16 U2.97
P99: CN1.1 U2.99 | length 23.4
  Top Layer w0.3: v1(35.228,27.078) 35.389,27.239 35.389,27.611 U2.99
  Bottom Layer w0.3: CN1.1 26.467,11.633 26.467,18.317 v1(35.228,27.078)
TCK: CN3.6 U2.48 | length 29.6
  Top Layer w0.3: v1(38.891,46.225) 38.941,46.275 39.204,46.275 U2.48
  Bottom Layer w0.3: v1(38.891,46.225) 40.64,47.974 CN3.6
TDI: CN3.10 U2.45 | length 44.3
  Top Layer w0.3: v1(38.887,44.501) 39.551,44.501 39.729,44.679 U2.45
  Bottom Layer w0.3: CN3.10 36.83,74.93 43.18,74.93 43.18,74.874 cw(c43.18,73.66) 43.89,72.676 43.769,72.588 ccw(c43.98,72.375) 43.768,72.587 43.68,72.499 43.68,49.374 43.18,48.874 43.18,48.768 38.913,44.501 v1(38.887,44.501)
TDO: CN3.8 U2.83 | length 42.3
  Top Layer w0.3: U2.83 32.995,36.53 v1(32.995,36.906)
  Bottom Layer w0.3: v1(32.995,36.906) 36.934,40.845 36.934,45.847 36.825,45.955 36.825,72.385 CN3.8
TMS: CN3.4 U2.47 | length 32.2
  Top Layer w0.3: v1(38.851,45.359) 38.995,45.359 U2.47
  Bottom Layer w0.3: v1(38.851,45.359) 38.958,45.359 43.18,49.581 CN3.4
pads on no net: CN3.12 CN3.14 U1.4 X1.1

## Polygon pours and split planes (outlines as drawn)
GND on Top Layer "Top Layer - GND" (solid, remove dead copper, pour order 0): 0,9.713 0,71.567 cw(c9.713,71.567) 9.713,81.28 69.079,81.28 cw(c69.079,71.619) 78.74,71.619 78.74,9.689 cw(c69.051,9.689) 69.051,0 9.713,0 cw(c9.713,9.713)
GND on Bottom Layer "Bottom Layer - GND" (solid, remove dead copper, pour order 1): 0,9.713 0,71.567 cw(c9.713,71.567) 9.713,81.28 69.079,81.28 cw(c69.079,71.619) 78.74,71.619 78.74,9.689 cw(c69.051,9.689) 69.051,0 9.713,0 cw(c9.713,9.713)

## Silkscreen, mask and mechanical layers (free items; w line width, h text height)
Top Overlay:
  lines w0.1: 26.645,6.071 26.67,6.071 ; 52.045,6.071 52.07,6.071 ; 52.07,16.789 52.095,16.789
  lines w0.2: 26.645,6.071 52.045,6.071 ; 26.67,6.071 26.67,8.89 ; 26.67,11.43 52.07,11.43 ; 26.67,13.97 26.67,16.789 ; 26.695,16.789 52.095,16.789 ; 29.21,6.071 29.21,8.89 ; 39.37,6.071 39.37,8.89 ; 52.07,6.071 52.07,8.89 ; 52.07,13.97 52.07,16.789
  text "GCK1 = P22 / GCK2 = P23 / GCK3 = P27" at 29.845,57.893 h3.3
  text "P50 / P53 / P55 / P58 / P60 / P63 / P65 / P67 / P70 / P72" at 2.08,41.949 h3.3
  text "P52 / P54 / P56 / P59 / P61 / P64 / P66 / P68 / P71 / P73" at 15.24,41.951 h3.3
  text "P49 / P43 / P41 / P39 / P36 / P34 / P32 / P29 / P27 / P24" at 57.96,41.949 h3.3
  text "P46 / P42 / P40 / P37 / P35 / P33 / P30 / P28 / P25 / P23" at 71.12,41.941 h3.3
  text "GND" at 36.375,14.326 h3.3
  text "P74 / P77 / P79 / P81 / P85 / P87 / P90 / P92 / P94 / P96" at 2.08,8.929 h3.3
  text "P22 / P19 / P17 / P15 / P13 / P11 / P9 / P7 / P4 / P2" at 57.96,8.929 h3.3
  text "P20 / P18 / P16 / P14 / P12 / P10 / P8 / P6 / P3 / P1" at 71.12,8.931 h3.3
  text "P76 / P78 / P80 / P82 / P86 / P89 / P91 / P93 / P95 / P97" at 15.24,8.91 h3.3
  text "P 99" at 24.762,6.677 h2.5
  text "+3V3" at 31.055,6.401 h3.3
  text "+5V" at 43.148,6.394 h3.3
  text "Xilinx XC95144XL DevBoard" at 10.951,2.154 h5
Bottom Overlay:
  drawing of 25 lines, arcs and shapes, not listed
  text "GTS1 = P3 / GTS2 = P4 / GTS3 = P1 / GTS4 = P2 /  / GSR  = P99" at 45.72,54.653 h3.3
  text "Version: '.Version' / Revision: '.Revision' / Date: '.Print_Date'" at 61.214,2.855 h2
Board:
  circle w0.1: c5.893,6.083 r1.6
  circle w0.1: c72.859,6.071 r1.6
  circle w0.1: c72.873,75.223 r1.6
  circle w0.1: c5.893,75.197 r1.6
  lines w0.1: 0,9.702 ccw(c9.702,9.702) 9.702,0 69.05,0 ccw(c69.05,9.69) 78.74,9.69 78.74,71.639 ccw(c69.099,71.639) 69.099,81.28 9.709,81.28 ccw(c9.709,71.571) 0,71.571 0,9.702